# Altium PCB 磁悬浮打样.PcbDoc
Units mm, origin at the board's own origin, x right, y up, seen from the top; angles counter-clockwise.
Board outline 100.35 x 100.23 mm, 2 copper layers (Top Layer, Bottom Layer); 75 components, 80 nets, 271 pads, 79 vias.
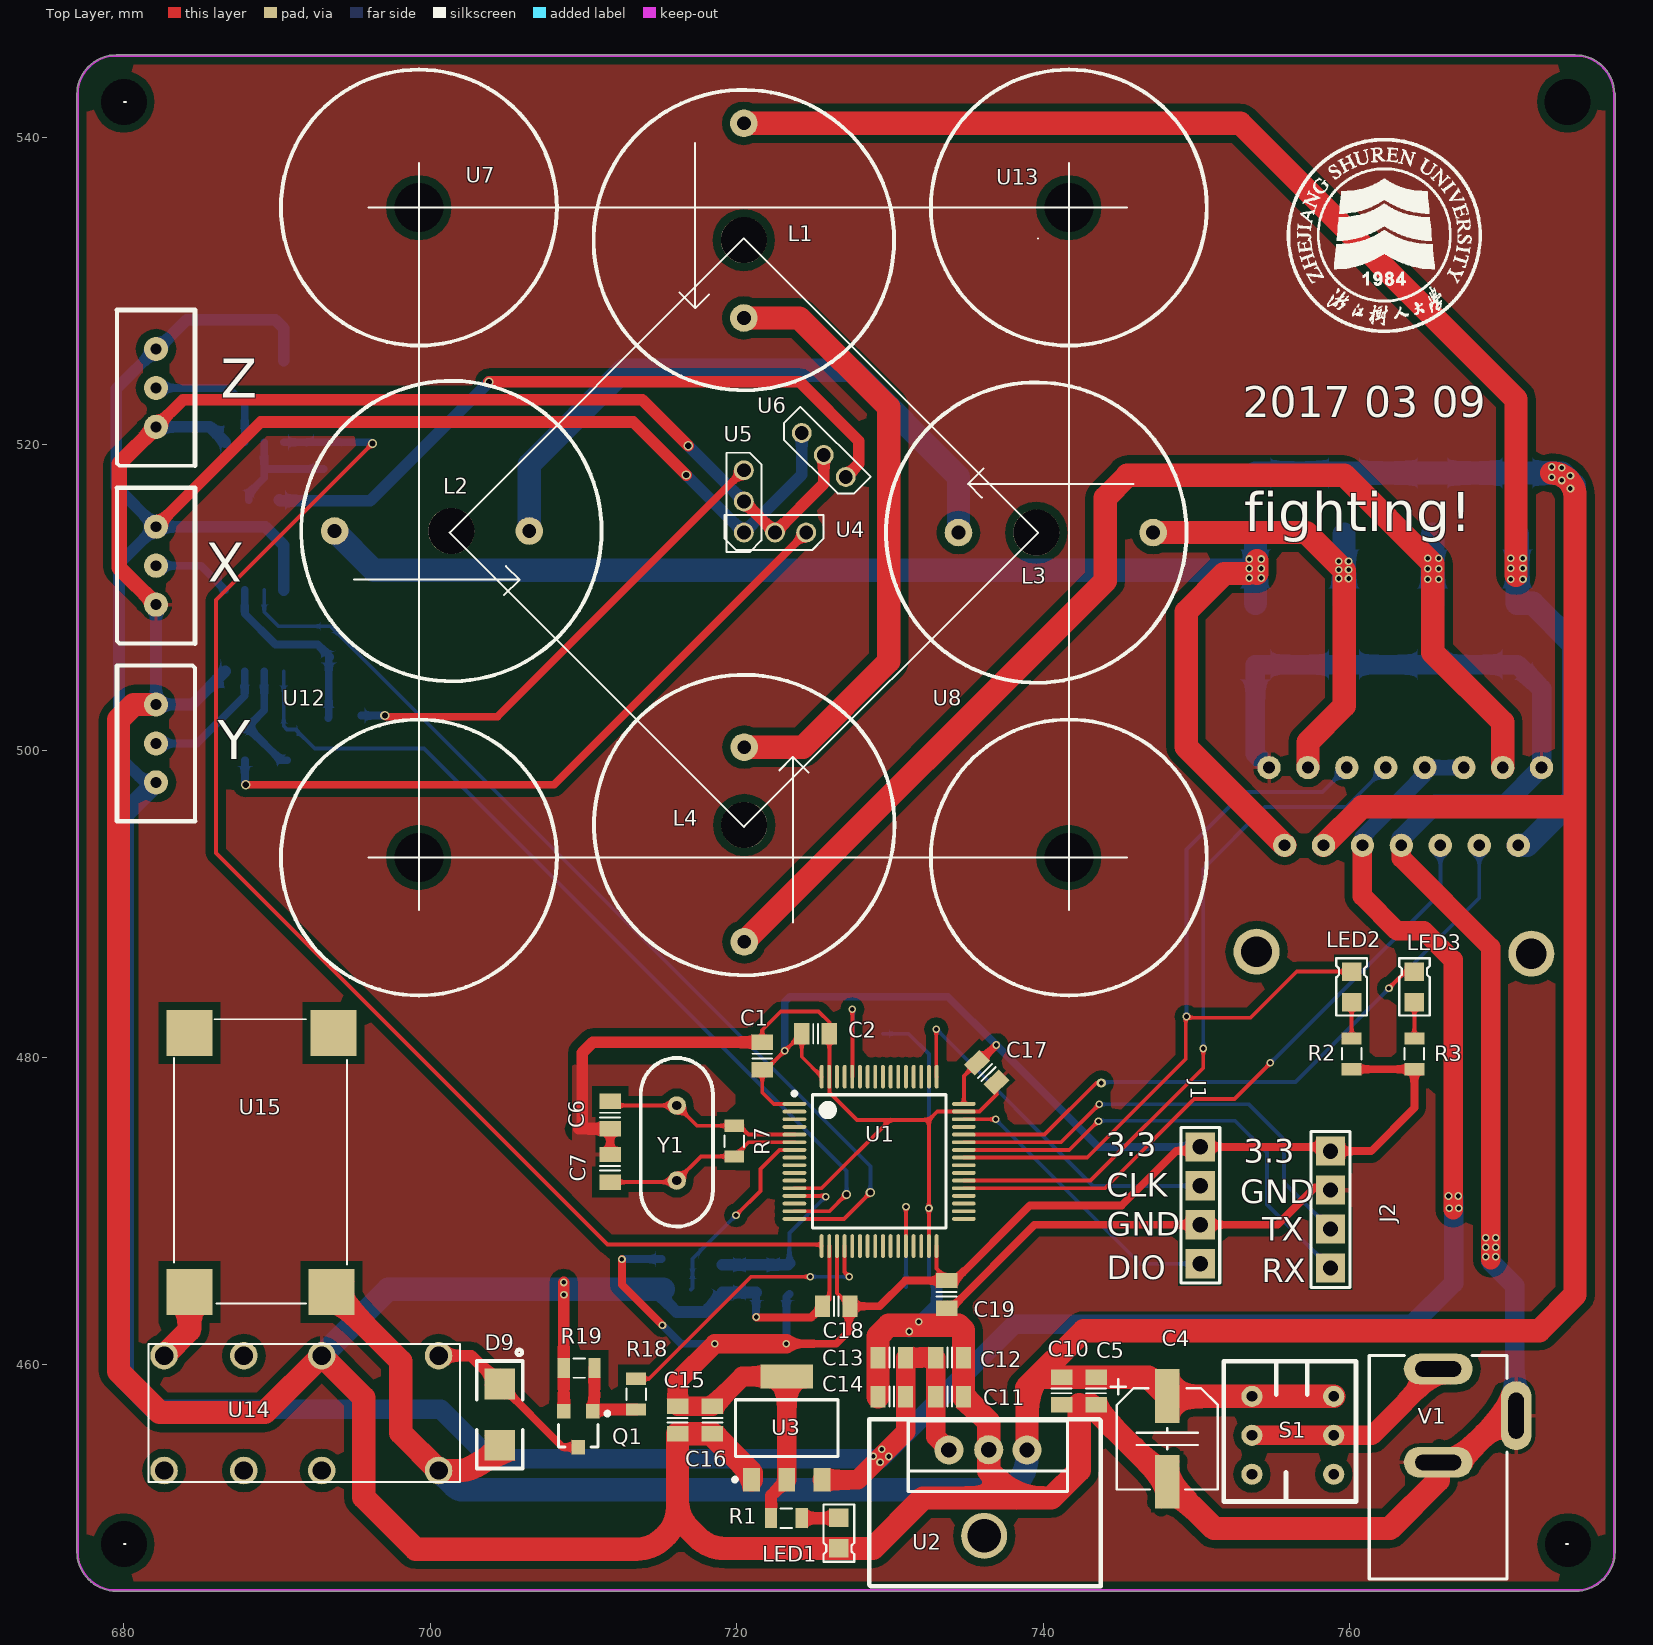
[diagram p0: Top Layer view]
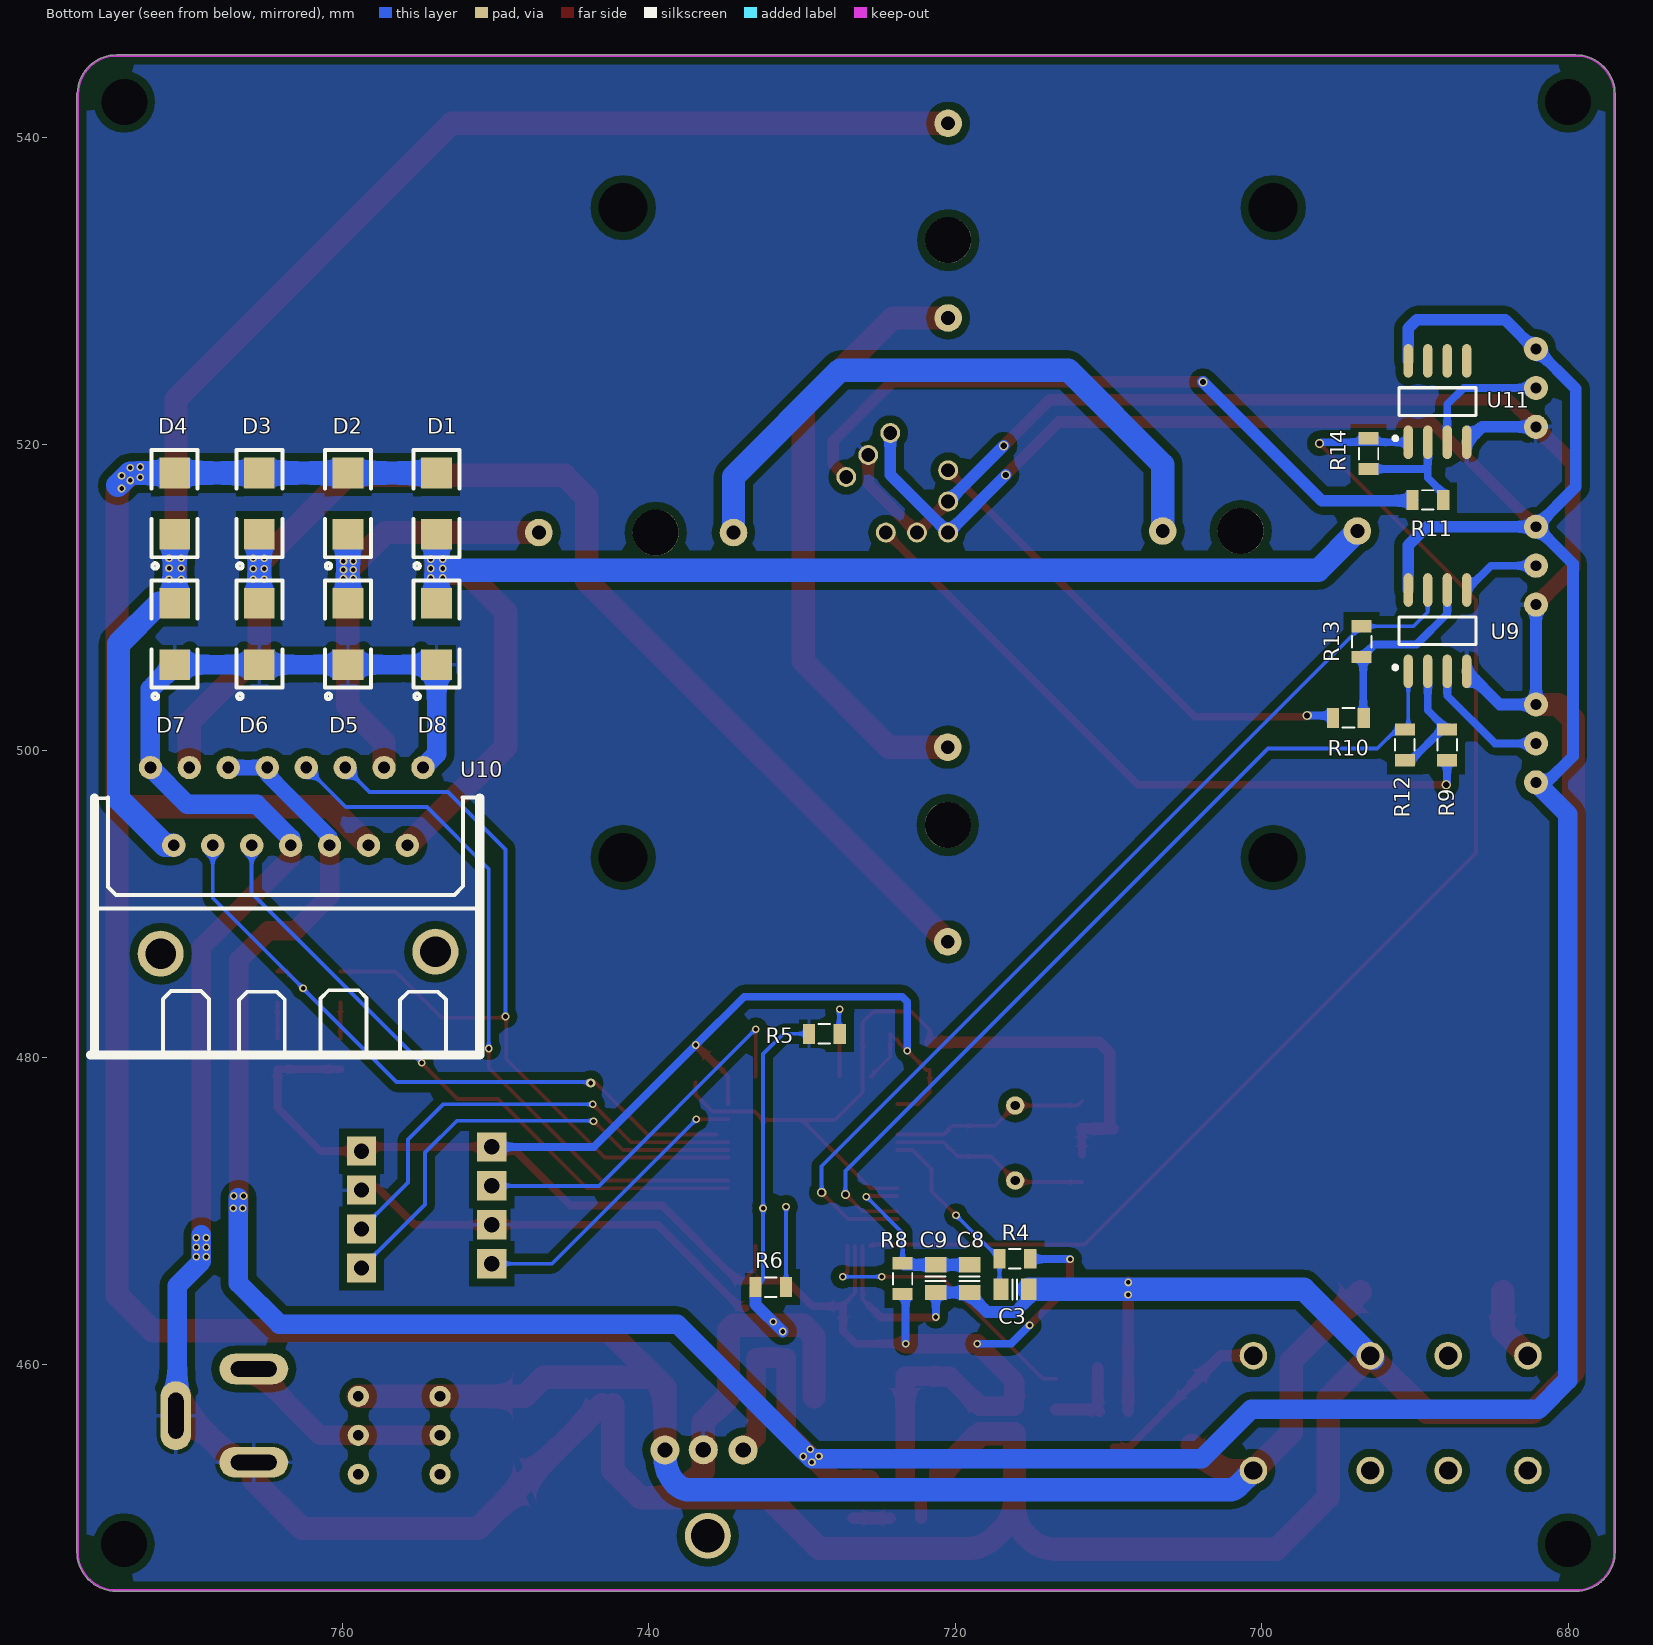
[diagram p1: Bottom Layer view, seen from below]

## Layer stack, top to bottom
Top Solder: solder mask 0.0102, Solder Resist, Dk 3.5
Top Layer: signal copper 0.0356
Dielectric 1: dielectric 0.32, FR-4, Dk 4.8
Bottom Layer: signal copper 0.0356
Bottom Solder: solder mask 0.0102, Solder Resist, Dk 3.5

## Board outline
676.961,447.749 cw(c677.025,447.75) 676.961,447.75 676.961,542.85 cw(c679.525,542.85) 679.524,545.414 cw(c679.525,545.35) 679.525,545.414 774.725,545.414 cw(c774.725,542.85) 777.288,542.93 cw(c777.252,542.877) 777.316,542.877 777.316,447.75 cw(c774.752,447.75) 774.753,445.186 cw(c774.752,445.25) 774.752,445.186 679.525,445.186 cw(c679.525,447.75)

## Design rules (kind name [scope] priority, off if disabled: settings)
Clearance Clearance_1 [InPolygon] p1: gap=0.508
Clearance [All] p2: gap=0.2
ComponentClearance [All] p1 off: gap=0.254 collisioncheckmode=3 verticalgap=0.254 showdistances=FALSE
HoleSize [All] p1: absolutevalues=TRUE maxlimit=3.5 minlimit=0.3 maxpercent=80.000 minpercent=20.000
MinimumSolderMaskSliver [All] p1: minsoldermaskwidth=0
PlaneClearance [All] p1: clearance=1.016
PolygonConnect [All] p1: connectstyle=Relief reliefconductorwidth=0.254 reliefentries=4 polygonreliefangle="90 Angle" airgapwidth=0.254
RoutingVias [All] p1: holewidth=0.3 width=0.5 viastyle="Through Hole" minholewidth=0.3 minwidth=0.3 maxholewidth=0.711 maxwidth=1.27
SilkToSilkClearance [All] p1: silktosilkclearance=0
SilkToSolderMaskClearance [IsPad] p1: minsilkscreentomaskgap=0 clearancetoexposedcopper=TRUE
SolderMaskExpansion [All] p1: expansion=0.102
Width [All] p1: maxlimit=2.54 minlimit=0.254 preferedwidth=0.254
24 further rules are at their usual default settings.

## Classes and differential pairs
component class 磁悬浮打样: C1 C2 C3 C4 C5 C6 C7 C8 C9 C13 C14 C15 C16 C17 C18 C19 D1 D2 D3 D4 D5 D6 D7 D8 D9 J1 J2 L1 L2 L3 L4 LED1 LED2 LED3 Q1 R1 R2 R3 R4 R5 R6 R7 R8 R9 R10 R11 R12 R13 R14 R18 R19 S1 U1 U3 U4 U5 U6 U7 U8 U9 U10 U11 U12 U13 U14 U15 V1 X Y Y1 Z

## Components (designator, comment, footprint, x,y, rotation, side; value= is the part's Value field where it differs from the comment)
C1 "Cap" CAP_0805 721.675,480.1 r270 top
C2 "Cap" CAP_0805 725.15,481.55 r0 top
C3 "104" CAP_0805 716.125,464.875 r0 bottom
C4 "Cap Pol1" CAP_ELEC_AL_6.3x4.2 748.1,455.125 r90 top
C5 "Cap" CAP_0805 743.45,458.25 r90 top
C6 "Cap" CAP_0805 711.75,476.25 r90 top
C7 "Cap" CAP_0805 711.75,472.775 r270 top
C8 "Cap" CAP_0805 719.075,465.575 r270 bottom
C9 "10uF" CAP_0805 721.288,465.575 r270 bottom
C10 "0.1uF" CAP_0805 741.2,458.25 r270 top
C11 "10uF" CAP_0805 733.9,457.875 r0 top
C12 "0.1uF" CAP_0805 733.9,460.425 r0 top
C13 "10uF" CAP_0805 730.125,460.425 r180 top
C14 "0.1uF" CAP_0805 730.125,457.875 r180 top
C15 "10uF" CAP_0805 716.149,456.35 r270 top
C16 "0.1uF" CAP_0805 718.424,456.35 r270 top
C17 "Cap" CAP_0805 736.325,479.025 r315 top
C18 "Cap" CAP_0805 726.5,463.775 r180 top
C19 "Cap" CAP_0805 733.7,464.55 r270 top
D1 "Diode" 1N5819 753.85,516.136 r90 bottom
D2 "Diode" 1N5819 759.63,516.136 r90 bottom
D3 "Diode" 1N5819 765.409,516.136 r90 bottom
D4 "Diode" 1N5819 770.939,516.136 r90 bottom
D5 "Diode" 1N5819 759.63,507.633 r90 bottom
D6 "Diode" 1N5819 765.409,507.633 r90 bottom
D7 "Diode" 1N5819 770.939,507.633 r90 bottom
D8 "Diode" 1N5819 753.85,507.633 r90 bottom
D9 "Diode" 1N5819 704.55,456.7 r270 top
J1 "SIP4" HDR1X4_180_2.54 750.25,466.551 r90 top
J2 "SIP4" "SIP4 H" 758.75,466.275 r90 top
L1 "线圈" 线圈 720.475,528.25 r90 top
L2 "线圈" 线圈 706.475,514.35 r180 top
L3 "线圈" 线圈 734.475,514.25 r0 top
L4 "线圈" 线圈 720.5,500.25 r270 top
LED1 "LED" LED0805蓝 726.675,448.975 r270 top
LED2 "LED" LED0805蓝 760.128,484.604 r90 top
LED3 "LED" LED0805蓝 764.222,484.604 r90 top
Q1 "NPN" SOT23-3 709.671,455.758 r180 top
R1 "170" RES_0805 723.25,449.95 r0 top
R2 "170" RES_0805 760.125,480.24 r90 top
R3 "170" RES_0805 764.222,480.24 r90 top
R4 "Res2" RES_0805 716.125,466.875 r180 bottom
R5 "Res2" RES_0805 728.55,481.55 r0 bottom
R6 "Res2" RES_0805 732.05,465.025 r180 bottom
R7 "Res2" RES_0805 719.85,474.55 r270 top
R8 "Res2" RES_0805 723.45,465.575 r90 bottom
R9 "3K" RES_0805 687.925,500.4 r270 bottom
R10 "3K" RES_0805 694.36,502.158 r0 bottom
R11 "3K" RES_0805 689.175,516.375 r0 bottom
R12 "10K" RES_0805 690.675,500.4 r270 bottom
R13 "10K" RES_0805 693.496,507.136 r270 bottom
R14 "10K" RES_0805 693.05,519.4 r270 bottom
R18 "2K" RES_0805 713.45,458.044 r90 top
R19 "5K" RES_0805 709.725,459.744 r180 top
S1 "SW DPDT" SW6 756.6,455.225 r90 top
U1 "STM32F103RCT6" LQFP64_L 729.3,473.225 r0 top
U2 "7805" TO-220 738.95,454.4 r180 top
U3 "1117-3.3" SOT223 723.275,455.825 r0 top
U4 "3503X" TO-92UA 720.475,514.25 r0 top
U5 "3503Y" TO-92UA 720.475,514.25 r90 top
U6 "3503Z" TO-92UA 724.25,520.75 r315 top
U7 "磁铁" 磁铁 699.275,535.45 r0 top
U8 "磁铁" 磁铁 741.675,493.05 r0 top
U9 "LM358" SOIC-8 688.55,507.85 r90 bottom
U10 "L298" L298N 755.75,493.84 r0 bottom
U11 "LM358" SOIC-8 688.55,522.795 r90 bottom
U12 "磁铁" 磁铁 699.275,493.05 r0 top
U13 "磁铁" 磁铁 741.675,535.45 r0 top
U14 "5v" relay-5v 700.557,453.06 r180 top
U15 "无线充电模块" 无线充电模块 684.301,464.718 r0 top
V1 "DC005" DC-005 765.775,460.7 r90 top
X "10K" VR 682.125,514.628 r270 top (schematic designator R16)
Y "10K" VR 682.125,497.95 r90 top (schematic designator R15)
Y1 "8Mhz" crystal 716.1,474.475 r270 top
Z "10K" VR 682.125,526.225 r270 top (schematic designator R17)

## Footprints (in the part's own frame and the unit in brackets; to place one, negate y for a bottom-side part, rotate by r counter-clockwise, add the part's x,y. Pads: shape width x height; smd on the part's side, far side on the other; paste and mask are expansions set on the pad)
1N5819 [mm]
  rect 2x2 smd: 1(-2,0) 2(2,0)
  silkscreen extent -4.24,-1.5 3.5,1.5, body extent -2.37,-1.35 2.63,1.35, height 2.28
CAP_0805 [mm]
  rect 1x1.4 smd: 1(-0.9,0) 2(0.9,0)
  Top Layer pour cut-out: -0.4,0.8 0.4,0.8 0.4,-0.8 -0.4,-0.8
  silkscreen extent -0.15,-0.65 0.15,0.65, body extent -1.1,-0.72 1.1,0.73, height 1.34
CAP_ELEC_AL_6.3x4.2 [mm]
  rect 3.5x1.6 smd: 1(2.8,0) 2(-2.8,0)
  silkscreen extent -3.3,-3.3 3.9,3.7, body extent -3.3,-3.3 3.3,3.3, height 4.23
crystal [mm]
  round 1.2 hole 0.6: 1(-2.4,0) 2(2.5,0)
  silkscreen extent -5.5,-2.35 5.5,2.35, body extent -5.45,-2.25 5.53,2.25, height 3.6
DC-005 [mm] "DC电源插座"
  oval 2x4.5 hole 1 slot 3 at 90 deg: 1(-1.016,0) 2(-7.112,0)
  oval 4.5x2 hole 1 slot 3 at 0 deg: 3(-4.064,-5.08)
  silkscreen extent -14.73,-4.5 -0.13,4.5, body extent -14.59,-5.01 -0.76,4.5, height 11.02
HDR1X4_180_2.54 [mm]
  rect 1.905x1.905 hole 1: 1(0,0) 2(2.54,0) 3(5.08,0) 4(7.62,0)
  silkscreen extent -1.27,-1.27 8.89,1.27, body extent -1.27,-1.27 8.89,1.27, height 7.58
L298N [mil]
  round 118.11 hole 78.74: 0(-72,273) 0(634,278)
  round 60 hole 30: 1(-40,-200) 2(0,0) 3(60,-200) 4(100,0) 5(160,-200) 6(200,0) 7(260,-200) 8(300,0) 9(360,-200) 10(400,0) 11(460,-200) 12(500,0) 13(560,-200) 14(600,0) 15(660,-200)
  silkscreen extent -188,-123 814,538, body extent -160,-194 785,535, height 984
LED0805蓝 [mm] "LED0805蓝"
  rect 1.2x1.27 smd: A(-1,0) K(1,0)
  silkscreen extent -1.87,-1 1.87,1, body extent -1.05,-0.67 1.05,0.68, height 0.8
LQFP64_L [mm] "Thin QFP, 64-Leads, Body 10x10mm, Pitch 0.5mm, IPC High Density"
  oval 1.55x0.25 smd: 1(-5.525,3.75) 2(-5.525,3.25) 3(-5.525,2.75) 4(-5.525,2.25) 5(-5.525,1.75) 6(-5.525,1.25) 7(-5.525,0.75) 8(-5.525,0.25) 9(-5.525,-0.25) 10(-5.525,-0.75) 11(-5.525,-1.25) 12(-5.525,-1.75) 13(-5.525,-2.25) 14(-5.525,-2.75) 15(-5.525,-3.25) 16(-5.525,-3.75) 33(5.525,-3.75) 34(5.525,-3.25) 35(5.525,-2.75) 36(5.525,-2.25) 37(5.525,-1.75) 38(5.525,-1.25) 39(5.525,-0.75) 40(5.525,-0.25) 41(5.525,0.25) 42(5.525,0.75) 43(5.525,1.25) 44(5.525,1.75) 45(5.525,2.25) 46(5.525,2.75) 47(5.525,3.25) 48(5.525,3.75)
  oval 0.25x1.55 smd: 17(-3.75,-5.525) 18(-3.25,-5.525) 19(-2.75,-5.525) 20(-2.25,-5.525) 21(-1.75,-5.525) 22(-1.25,-5.525) 23(-0.75,-5.525) 24(-0.25,-5.525) 25(0.25,-5.525) 26(0.75,-5.525) 27(1.25,-5.525) 28(1.75,-5.525) 29(2.25,-5.525) 30(2.75,-5.525) 31(3.25,-5.525) 32(3.75,-5.525) 49(3.75,5.525) 50(3.25,5.525) 51(2.75,5.525) 52(2.25,5.525) 53(1.75,5.525) 54(1.25,5.525) 55(0.75,5.525) 56(0.25,5.525) 57(-0.25,5.525) 58(-0.75,5.525) 59(-1.25,5.525) 60(-1.75,5.525) 61(-2.25,5.525) 62(-2.75,5.525) 63(-3.25,5.525) 64(-3.75,5.525)
  silkscreen extent -5.65,-4.35 4.35,4.55, body extent -5,-5 5,5, height 1.6
relay-5v [mm]
  round 1.8 hole 1.2: 1(0,0) 2(0,-7.493) 3(7.62,0) 4(12.7,0) 5(17.907,0) 6(7.62,-7.493) 7(12.7,-7.493) 8(17.907,-7.493)
  silkscreen extent -1.4,-8.26 18.92,0.76, body extent -1.38,-8.86 18.92,1.24, height 11.4
RES_0805 [mm] "Chip Resistor, Body 2.0x1.2mm, 0805, IPC Medium Density"
  rect 0.8x1.3 smd: 1(-1,0) 2(1,0)
  Top Layer pour cut-out: -0.6,0.75 0.6,0.75 0.6,-0.75 -0.6,-0.75
  silkscreen extent -0.38,-0.64 0.38,0.64, body extent -1.1,-0.67 1.1,0.68, height 0.69
"SIP4 H" [mm]
  rect 1.905x1.905 hole 1: 1(0,0) 2(2.54,0) 3(5.08,0) 4(7.62,0)
  silkscreen extent -1.27,-1.27 8.89,1.27, body extent -2.31,-7.24 10.19,0.36, height 5.9
SOIC-8 [mm]
  oval 2.2x0.6 smd: 1(-2.654,1.905) 2(-2.654,0.635) 3(-2.654,-0.635) 4(-2.654,-1.905) 5(2.654,-1.905) 6(2.654,-0.635) 7(2.654,0.635) 8(2.654,1.905)
  silkscreen extent -2.52,-2.5 0.9,2.88, body extent -3,-2.45 3,2.45, height 1.7
SOT23-3 [mm]
  rect 0.9x0.95 smd: 1(-0.95,-1.175) 2(0.95,-1.175) 3(0,1.175)
  silkscreen extent -2.03,-1.14 1.3,1.18, body extent -1.45,-1.4 1.45,1.4, height 1.2
SOT223 [mm]
  rect 1.1x1.55 smd: 1(-2.3,-3.375) 2(0,-3.375) 3(2.3,-3.375)
  rect 3.45x1.55 smd: 4(0,3.375)
  silkscreen extent -3.5,-3.48 3.35,1.85, body extent -3.25,-3.48 3.25,3.48, height 1.7
SW6 [mm]
  round 1.38 hole 0.7: 1(-2.409,-2.357) 2(0.131,-2.357) 3(2.671,-2.357) 4(2.671,2.977) 5(0.131,2.977) 6(-2.409,2.977)
  silkscreen extent -4.19,-3.81 4.95,4.83, body extent -4.52,-4.02 5.28,5.18, height 18
TO-92UA [mm]
  round 1.3 hole 0.9: 1(0,0) 2(2.032,0) 3(4.064,0)
  silkscreen extent -1.27,-1.14 5.21,1.14, body extent -0.57,-2.16 4.63,2.03, height 15
TO-220 [mm]
  round 3 hole 2.2: 0(2.8,5.6)
  round 1.9 hole 1: 1(0,0) 2(2.502,-0.013) 3(5.1,0.005)
  silkscreen extent -4.8,-2 10.3,8.9, body extent -4.59,-2.09 10.19,8.72, height 25
VR [mil]
  round 62 hole 28: 1(0,0) 2(200,0) 3(100,0)
  silkscreen extent -100,-100 300,100, body extent -91,-95 285,95, height 453
无线充电模块 [mm]
  rect 3x3 smd: 1(0,0) 2(9.271,0) ""(0,16.891) ""(9.398,16.891)
  silkscreen extent -1.02,-0.76 10.29,17.78, body extent -0.89,-0.64 10.16,17.65, height 1.9
磁铁 [mm]
  round 3 hole 3.2: 0(0,0)
  silkscreen extent -9,-9 9,9, body extent -8.93,-8.98 9,8.98, height 18
线圈 [mm]
  round 1.8 hole 0.9: 0(0,0) 1(12.7,0)
  round 3 hole 3: 2(5.08,0)
  silkscreen extent -4.72,-9.8 14.88,9.8, body extent -4.7,-9.91 14.86,9.62, height 12.2

## Part data
C1: "Capacitor"
C2 C17 C18 C19: library part Cap_1, "Capacitor"
C3 C9: library part C
C4: library part "Cap Pol1_1", "Polarized Capacitor (Radial)"
C5: library part Cap_2, "Capacitor"
C6 C7 C8: library part Cap_3, "Capacitor"
C10 C11 C12 C13 C14 C15 C16: library part CAP
D1 D2 D3 D4 D5 D6 D7 D8 D9: "Default Diode"
J1 J2: "jointbar"
Q1: library part NPN1, "贴片三极管"
R1 R2 R3 R9 R10 R11 R12 R13 R14 R18 R19: library part RESistor
R4 R8: library part Res2_1, "Resistor"
R5 R6 R7: "Resistor"
S1: "Switch"
U1: library part STM32F103RDT6
U2: library part 7812
U3: library part 1117
U4 U5 U6: library part 3503
U9 U11: "双运放"
U14: library part relay-5V
U15: library part 无线充电
X Y Z: library part RESVR, "Potentiometer"
Y1: library part XTAL, "Crystal Oscillator"

## Free pads (board coordinates)
  round 1.8 hole 3: 0(680.033,448.258) 0(680.033,542.342) 0(774.217,542.342) 0(774.242,448.258)

## Via types
v1: diameter 0.5, hole 0.3, Top Layer to Bottom Layer, 70 vias
v2: diameter 0.6, hole 0.4, Top Layer to Bottom Layer, 8 vias
v3: diameter 0.6, hole 0.3, Top Layer to Bottom Layer, 1 vias

## Nets (pads, with @x,y where several pads share a name; then routed paths per layer and width w, separated by ;. In a path a pad name is that pad's centre, name@x,y a point inside that pad or via, vN(x,y) a via of type N, cw(c..) or ccw(c..) an arc to the next point about the centre after c; other vN are vias at no path point)
+3V3: C1.2 C2.1 C15.1 C16.1 C17.1 C18.1 C19.1 J1.4 J2.4 R1.1 R2.1 R3.1 R4.2 R8.1 U1.1 U1.19 U1.32 U1.48 U1.64 U3.2 U3.4 | length 155.2
  Top Layer w0.254: v1@723.116,480.416 721.9,479.2 C1.2 721.675,477.725 722.425,476.975 U1.1 ; v1@723.14,480.439 C2.1 724.25,480.05 U1.64 ; U1.19 726.55,464.625 C18.1 ; U1.32 733.05,466.25 C19.1@733.7,465.6 ; U1.48 734.825,478.798 C17.1@735.559,479.531 ; J2.4@758.474,474.171 J2.4
  Top Layer w0.508: v1(712.521,466.852) 712.521,465.176 v1(715.162,462.534) ; v1@723.114,480.417 v1(723.138,480.441) ; v1(723.25,461.325) 726.5,461.325 727.325,462.15 C18.1@727.325,463.85 ; C18.1 729.325,463.775 731,465.45 C19.1 734.233,465.45 739.14,470.357 745.134,470.357 748.703,473.926 750.005,473.926 J1.4 J2.4@758.474,474.171 ; C17.1@735.559,479.531 735.64,479.531 v1(736.93,480.822) ; J2.4 761.395,473.895 764.222,476.722 R3.1 ; R2.1 R3.1 ; 764.222,478.525 R3.1
  Top Layer w0.762: R1.1 722.25,451.425 U3.2
  Top Layer w1.27: v1(723.25,461.325) v1(718.576,461.325) 716.149,458.898 C15.1 C16.1 720.374,459.2 U3.4 U3.2
  Bottom Layer w0.508: v1(712.521,466.852) 715.102,466.852 R4.2 ; v1(715.162,462.534) 716.371,461.325 v1(718.576,461.325) ; v1(723.138,480.441) 723.138,483.641 723.468,483.972 733.781,483.972 v1(736.93,480.822) 743.581,474.171 J1.4 ; v1(723.25,461.325) 723.25,464.375 R8.1
+5V: C11.1 C12.1 C13.1 C14.1 U2.3 U3.3 U4.1 U5.1 U6.1 U9.8 U10.6 U10.9 U10.11 U11.8 X.1 Y.1 Z.1 | length 303.8
  Top Layer w0.762: X.1 688.96,521.462 713.263,521.462 v2(716.717,518.008)
  Top Layer w1.27: U3.3 727.9,452.45 731.025,455.575 C14.1 C13.1 C12.1 C11.1 733,455.245 U2.3 ; U10.6 760.83,490.526 763.088,488.268 764.841,488.268 766.743,486.366 766.743,470.06
  Bottom Layer w0.762: Y.1 681.423,497.95 679.712,499.661 679.712,512.215 X.1 ; U9.8 690.455,513.42 689.248,514.628 X.1 ; U11.8 690.455,527.57 689.9,528.125 684.125,528.125 682.225,526.225 Z.1 679.525,523.625 679.525,517.228 X.1 ; v2(716.717,518.008) U4.1 724.25,518.025 U6.1
  Bottom Layer w1.016: U10.6 760.83,494.405 764.894,498.469 U10.9 U10.11
  Bottom Layer w1.27: Y.1 680.058,495.883 680.058,458.954 681.965,457.048 700.71,457.048 703.936,453.822 729.361,453.822 738.149,462.61 764.108,462.61 766.775,465.277 766.775,470.865
  other v1: 729.361,453.593 729.92,453.974 728.904,454 729.463,454.457 766.496,470.179 767.105,470.179 766.445,470.967 767.08,470.967
+12V: C4.1 C5.2 C10.1 D1.2 D2.2 D3.2 D4.2 D9.2 S1.3 S1.4 U2.1 U10.4 U14.1 U15.2 | length 216
  Top Layer w1.524: U15.2 698.094,460.197 698.094,455.524 U14.1 701.858,453.06 ccw(c701.858,455.6) 703.654,453.804 D9.2 ; U2.1 738.95,458.4 ; U10.4 760.817,496.367 774.649,496.367 ; S1.3 S1.4 748.129,457.896 C4.1 746.875,459.15 C5.2 C10.1 739.7,459.15 738.95,458.4 ; 773.175,518.136 cw(c773.175,516.611) 774.7,516.611 774.7,464.515 772.363,462.178 742.651,462.178 738.911,458.439 738.95,458.4
  Bottom Layer w1.524: U14.1 701.58,452.037 ccw(c702.152,452.609) 702.152,451.8 737.346,451.8 ccw(c737.346,453.016) 738.206,452.156 ccw(c736.41,453.952) 738.95,453.952 U2.1 ; D1.2 D2.2 D3.2 D4.2 773.839,518.136 774.65,517.325
  other v1: 774.4,517.125 773.825,517.65 773.175,517.85 774.4,517.95 773.825,518.475 773.175,518.525
BOOT0: R5.1 U1.60 | length 6
  Top Layer w0.254: U1.60 v1(727.55,483.15)
  Bottom Layer w0.254: R5.1@727.6,481.6 v1@727.6,483.15
BOOT1: R6.2 U1.28 | length 7.8
  Top Layer w0.254: U1.28 v1(731.05,470.275)
  Bottom Layer w0.254: R6.2 v1(731.05,470.275)
GND: C1.1 C2.2 C3.1 C4.2 C5.1 C6.1 C7.1 C8.2 C9.2 C10.2 C11.2 C12.2 C13.2 C14.2 C15.2 C16.2 C17.2 C18.2 C19.2 D5.1 D6.1 D7.1 D8.1 J1.2 J2.3 LED1.K Q1.2 R5.2 R6.1 R19.2 U1.12 U1.18 U1.31 U1.47 U1.63 U2.2 U3.1 U4.2 U5.2 U6.2 U9.4 U10.1 U10.8 U10.15 U11.4 U14.6 V1.2 V1.3 X.2 Y.2 Z.2 | length 527.2
  Top Layer w0.254: C1.1 721.675,481.797 722.884,483.006 725.348,483.006 726.05,482.304 C2.2 U1.63 726.05,477.732 727.848,475.934 730.01,475.934 ; U1.12 725.551,471.475 730.01,475.934 ; C18.2 726.05,464.225 U1.18 ; U1.31 v1(732.55,470.175) 732.55,475.934 ; C17.2 736.961,477.586 735.85,476.475 U1.47 733.091,476.475 732.55,475.934 ; 730.01,475.934 732.55,475.934
  Top Layer w0.507: v1(721.275,463.075) 721.3,463.05 724.875,463.05 C18.2
  Top Layer w0.508: C7.1 C6.1 ; C19.2 733.998,463.65 739.439,469.091 J1.2 755.291,469.091 757.725,471.525 758.58,471.525 J2.3
  Top Layer w0.762: Z.2 683.89,522.91 713.847,522.91 v2(716.844,519.913) ; Q1.2@708.725,456.938 R19.2 v1(708.725,465.328) ; C6.1 709.712,475.35 709.93,475.568 709.93,480.314 710.616,481 C1.1 ; U5.2 U4.2 725.687,517.43 U6.2
  Top Layer w1.016: X.2 679.729,511.943 679.729,518.749 Z.2
  Top Layer w1.27: 742.35,457.35 C5.1@743.075,457.35 ; U10.8 763.37,493.015 769.188,487.197 769.188,466.801
  Top Layer w1.524: Y.2 680.678,503.03 679.679,502.031 679.679,459.537 682.371,456.844 689.229,456.844 U14.6 695.681,457.81 695.681,451.318 699.074,447.925 713.448,447.925 ccw(c713.448,450.465) 715.244,448.669 715.405,448.83 ccw(c713.609,450.626) 716.149,450.626 716.149,451.053 ; U3.1 720.975,452.898 C16.2 C15.2 716.149,451.053 ; C14.2 C13.2 729.225,461.825 729.925,462.525 734.475,462.525 734.8,462.2 C12.2 C11.2 736.448,456.227 U2.2 736.448,453.052 738.238,451.262 ; 742.35,457.35 742.35,453.075 740.537,451.262 738.238,451.262 ; C5.1@743.075,457.35 C4.2 751.15,449.275 762.625,449.275 765.775,452.425 V1.2 766.988,453.588 770.036,456.636 V1.3 ; 716.149,451.053 ccw(c718.689,451.053) 716.893,449.257 717.431,448.719 ccw(c719.227,450.515) 719.227,447.975 LED1.K 728.875,447.975 732.162,451.262 738.238,451.262
  Bottom Layer w0.254: R5.2 731.224,481.55 732.55,480.224 v1(732.55,470.175) 732.55,465.525 R6.1
  Bottom Layer w0.507: v1(721.275,463.075) 721.275,464.662 C9.2
  Bottom Layer w0.762: X.2 Y.2 684.479,503.03 U9.4 ; Z.2 685.641,521.145 U11.4 ; C3.1 715.225,464.25 716.075,463.4 717.95,463.4 719.075,464.525 C8.2 C9.2 ; v2(716.844,519.913) U5.2 ; v1(731.266,462.128) 733.05,463.912 R6.1
  Bottom Layer w1.27: U10.1 753.85,499.804 D8.1 D5.1 D6.1 D7.1 772.514,504.058 U10.15 770.119,496.525 765.587,496.525 763.37,494.308 U10.8 ; 769.188,468.427 769.188,466.7 770.763,465.125 V1.3@770.763,456.728
  Bottom Layer w1.524: U14.6@692.785,460.375 697.285,464.875 C3.1
  other v1: 731.876,462.763 708.736,464.515 768.883,467.004 769.518,467.004 768.883,467.614 769.518,467.614 768.883,468.249 769.518,468.249
IN1: LED2.K U1.41 U10.5 | length 55.5
  Top Layer w0.254: U1.41 742.875,473.475 749.3,479.9 749.3,482.6 753.542,482.6 756.545,485.604 LED2.K
  Bottom Layer w0.254: v1(749.351,482.676) 749.351,493.573 753.11,497.332 758.226,497.332 U10.5
IN2: U1.38 U10.7 | length 47
  Top Layer w0.254: U1.38 743.095,471.975 750.443,479.323 v1(750.443,480.593) ; U10.7@762.281,498.847 U10.7 U10.7@762.354,498.604
  Bottom Layer w0.254: v1(750.443,480.593) 750.443,492.303 754.482,496.341 759.776,496.341 U10.7 U10.7@762.354,498.626
IN3: U1.37 U10.10 | length 42.2
  Top Layer w0.254: U1.37 744.024,471.475 749.849,477.3 752.475,477.3 v1(754.825,479.65)
  Bottom Layer w0.254: v1(754.825,479.65) 765.91,490.735 U10.10
IN4: LED3.K U1.44 U10.12 | length 45.2
  Top Layer w0.254: U1.44@735.584,474.975 740.1,474.975 743.462,478.337 v3(743.788,478.337) ; v1(762.559,484.53) 763.632,485.604 LED3.K LED3.K@764.041,485.784
  Bottom Layer w0.254: v3(743.788,478.337) 743.725,478.4 756.454,478.4 768.45,490.396 U10.12
KEY0: U1.59
KEY1: U1.58
LED: R18.2 U1.20 | length 18.8
  Top Layer w0.254: R18.2 714.294,459.044 720.95,465.7 v1(724.8,465.7) ; U1.20 727.05,466 v1(727.35,465.7)
  Bottom Layer w0.254: v1(724.8,465.7) v1(727.35,465.7)
NetC6_2: C6.2 R7.1 U1.5 Y1.1 | length 12.9
  Top Layer w0.254: C6.2 712.025,476.875 Y1.1 717.425,475.55 R7.1 720.2,475.55 720.775,474.975 U1.5
NetC7_2: C7.2 R7.2 U1.6 Y1.2 | length 13.1
  Top Layer w0.254: C7.2 716,471.875 Y1.2 717.675,473.55 R7.2 720.775,474.475 U1.6
NetC8_1: C8.1 C9.1 R8.2 U1.13 | length 11.7
  Top Layer w0.254: U1.13@723.823,470.978 v1@725.819,470.978
  Bottom Layer w0.254: R8.2 723.45,468.558 v1(725.819,470.927)
  Bottom Layer w0.762: C8.1 C9.1 723.35,466.475 R8.2
NetD9_1: D9.1 Q1.3 U14.2 | length 11.6
  Top Layer w0.508: D9.1 708.667,454.583 Q1.3
  Top Layer w0.762: U14.2 702.697,460.553 D9.1
NetL1_0: L1.0 L4.0 | length 40.2
  Top Layer w1.524: L1.0 724.097,528.25 729.925,522.422 729.925,505.846 724.329,500.25 L4.0
NetL2_0: L2.0 L3.0 | length 41.4
  Bottom Layer w1.524: L2.0 706.475,518.675 712.65,524.85 727.525,524.85 734.475,517.9 L3.0
NetLED1_A: LED1.A R1.2 | length 2.4
  Top Layer w0.762: R1.2 LED1.A@726.65,449.95
NetLED2_A: LED2.A R2.2 | length 2.4
  Top Layer w0.254: R2.2@760.128,481.243 LED2.A
NetLED3_A: LED3.A R3.2 | length 2.4
  Top Layer w0.254: R3.2 LED3.A
NetQ1_1: Q1.1 R18.1 R19.1 | length 5.6
  Top Layer w0.762: Q1.1 710.725,457.038 R19.1 ; Q1.1@710.732,457.044 R18.1
NetR9_1: R9.1 R12.2 U9.2 | length 7.9
  Bottom Layer w0.508: U9.2 689.185,502.66 R9.1 688.26,501.4 690.26,499.4 R12.2
NetR9_2: R9.2 U4.3 | length 45
  Top Layer w0.508: v2(687.975,497.8) 708.089,497.8 U4.3
  Bottom Layer w0.508: R9.2 687.925,497.85 v2(687.975,497.8)
NetR10_1: R10.1 R13.2 U9.6 | length 12.3
  Bottom Layer w0.508: U9.6 687.915,508.958 689.923,506.95 692.683,506.95 R13.2 ; R10.1 693.4,502.198 R13.2@693.4,506.136
NetR10_2: R10.2 U5.3 | length 31.7
  Top Layer w0.508: v2(697.052,502.31) 697.128,502.234 704.395,502.234 U5.3
  Bottom Layer w0.508: R10.2@695.512,502.31 v2(697.052,502.31)
NetR11_1: R11.1 R14.2 U11.2 | length 8.1
  Bottom Layer w0.508: R11.1 688.175,516.825 689.185,517.835 689.185,518.45 ; U11.2 689.185,518.45 ; R14.2 689.235,518.4 689.185,518.45
NetR11_2: R11.2 U6.3 | length 45.3
  Top Layer w0.762: v2(703.853,524.078) 724.122,524.078 727.975,520.225 727.975,518.728 U6.3
  Bottom Layer w0.762: R11.2 690.219,516.331 696.106,516.331 v2(703.853,524.078)
NetR15_3: U9.3 Y.3 | length 8.7
  Bottom Layer w0.508: Y.3 684.792,500.49 687.915,503.613 U9.3
NetR16_3: U9.5 X.3 | length 5.2
  Bottom Layer w0.508: X.3 685.061,512.088 U9.5
NetR17_3: U11.3 Z.3 | length 8.7
  Bottom Layer w0.508: Z.3 686.84,523.685 687.915,522.61 U11.3
NetU14_8: U14.8 U15.1 | length 4.8
  Top Layer w1.524: U14.8 684.301,462.204 U15.1
OUT1: D1.1 D8.2 L2.1 U10.2 | length 89.1
  Top Layer w1.524: 753.415,511.581 751.815,511.581 749.325,509.092 749.325,500.265 U10.2 ; 753.948,511.581 753.948,512.424
  Bottom Layer w1.524: L2.1 696.337,511.788 v1@753.415,511.788 ; D8.2 D1.1
  other v1: 753.44,511.285 754.228,511.285 753.44,511.903 754.228,511.903 753.44,512.521 754.228,512.521
OUT2: D2.1 D5.2 L3.1 U10.3 | length 31.8
  Top Layer w1.524: L3.1 757.175,514.25 759.65,511.775 759.65,502.95 757.274,500.574 U10.3
  Bottom Layer w1.524: D5.2 D2.1
  other v1: 759.275,511.25 759.925,511.25 759.275,511.817 759.925,511.817 759.275,512.375 759.925,512.375
OUT3: D3.1 D6.2 L4.1 U10.13 | length 82.8
  Top Layer w1.524: L4.1 744.042,511.092 744.042,516.509 745.49,517.957 ; 745.49,518 759.65,518 765.425,512.225 765.425,506.425 769.974,501.876 U10.13
  Bottom Layer w1.524: D6.2 D3.1
  other v1: 765.1,511.2 765.8,511.2 765.1,511.887 765.8,511.887 765.1,512.575 765.8,512.575
OUT4: D4.1 D7.2 L1.1 U10.14 | length 93.5
  Top Layer w1.524: L1.1 752.85,540.95 770.85,522.95 770.85,511.475
  Bottom Layer w1.524: D4.1 D7.2 771.942,509.633 774.6,506.975 774.6,496.875 771.565,493.84 U10.14
  other v1: 770.5,511.199 771.3,511.199 770.5,511.914 771.3,511.914 770.5,512.579 771.3,512.579
PA0: U1.14
PA1: R12.1 U1.15 U9.1 | length 57.7
  Top Layer w0.254: U1.15 726.058,469.975 727.151,471.068 v2(727.177,471.068)
  Bottom Layer w0.254: U9.1 690.455,501.62 R12.1 691.232,501.4 692.48,500.151 699.618,500.151 727.177,472.592 v2(727.177,471.068)
PA2: R13.1 U1.16 U9.7 | length 63.3
  Top Layer w0.254: U1.16 727.006,469.475 v2(728.726,471.195)
  Bottom Layer w0.254: U9.7 689.185,509.06 690.109,508.136 R13.1 728.726,472.907 v2(728.726,471.195)
PA3: R14.1 U1.17 U11.1 | length 86.9
  Top Layer w0.254: v2(696.239,520.065) 686.029,509.854 686.029,493.344 711.581,467.792 721.665,467.792 725.458,467.792 U1.17
  Bottom Layer w0.508: U11.1 696.163,520.141 v2(696.239,520.065)
PA5: U1.21
PA6: U1.22
PA7: U1.23
PA9: J2.1 U1.42 | length 31.4
  Top Layer w0.254: U1.42 741.7,473.975 743.564,475.839 v1(743.61,475.839)
  Bottom Layer w0.254: v1(743.61,475.839) 743.61,475.865 743.6,475.875 752.525,475.875 ; 752.375,475.875 752.525,475.875 ; J2.1@758.25,466.275 J2.1 754.6,470.425 754.6,473.8 752.525,475.875
PA10: J2.2 U1.43 | length 30
  Top Layer w0.254: U1.43 741.175,474.475 v1(743.65,476.95)
  Bottom Layer w0.254: v1(743.65,476.95) 753.425,476.95 755.725,474.65 755.725,471.84 J2.2
PA12: U1.45
PA15: U1.50
PB0: U1.26
PB1: U1.27
PB3: U1.55
PB4: U1.56
PB5: U1.57
PB8: U1.61
PB9: U1.62
PB10: U1.29
PB11: U1.30
PB12: U1.33
PB13: U1.34
PB14: U1.35
PB15: U1.36
PC0: U1.8
PC1: U1.9
PC2: U1.10
PC3: U1.11
PC4: U1.24
PC5: U1.25
PC8: U1.39
PC9: U1.40
PC10: U1.51
PC11: U1.52
PC12: U1.53
PC13: U1.2
PC14: U1.3
PC15: U1.4
PD2: U1.54
RESET: C3.2 R4.1 U1.7 | length 12.5
  Top Layer w0.254: v1(719.963,469.713) 721.55,471.3 721.55,472.725 722.8,473.975 U1.7
  Bottom Layer w0.254: C3.2 717.125,464.975 R4.1 v1(719.963,469.713)
SWD_CLK: J1.3 U1.49 | length 24.6
  Top Layer w0.254: v1(733.025,481.85) 733.025,478.775 U1.49
  Bottom Layer w0.254: v1(733.025,481.85) 743.244,471.631 J1.3
SWD_DIO: J1.1 U1.46 | length 19.3
  Top Layer w0.254: U1.46 v1(736.9,475.975)
  Bottom Layer w0.254: v1(736.9,475.975) 746.324,466.551 J1.1
VCC: S1.2 S1.5 V1.1 | length 13.9
  Top Layer w1.27: S1.5 S1.2 761.447,455.356 V1.1
pads on no net: L1.2 L2.2 L3.2 L4.2 S1.1 S1.6 U2.0 U7.0 U8.0 U10.0 U11.5 U11.6 U11.7 U12.0 U13.0 U14.3 U14.4 U14.5 U14.7 U15.

## Polygon pours and split planes (outlines as drawn)
GND on Top Layer "Top Layer-No Net" (solid, remove dead copper, pour order 9): 780.263,547.726 671.551,547.726 667.715,543.89 673.075,538.531 673.075,440.182 783.717,440.182 785.038,441.503
GND on Top Layer "Top Layer-No Net" (solid, remove dead copper, pour order 6): 709.27,479.654 709.397,479.527 717.956,479.527 719.912,477.571 719.912,471.145 717.55,468.782 711.378,468.782 711.302,468.782 709.27,470.814
GND on Bottom Layer "Top Layer-No Net" (solid, remove dead copper, pour order 7): 785.114,437.947 783.717,436.55 668.553,436.55 668.553,553.415 665.201,556.768 679.196,570.763 799.135,570.763

## Keep-outs
Keep-Out Layer:
  lines w0.127: 777.225,542.85 ccw(c774.725,542.85) 774.725,545.35 679.525,545.35 ccw(c679.525,542.85) 677.025,542.85 677.025,447.75 ccw(c679.525,447.75) 679.525,445.25 774.752,445.25 ccw(c774.752,447.75) 777.252,447.75 777.252,542.877

## Other copper
Top Layer:
  pour cut-out: 711.75,471.875 711.75,477.15 715.825,477.15 717.425,475.55 719.85,475.55 719.85,473.55 717.675,473.55 716,471.875

## Silkscreen, mask and mechanical layers (free items; w line width, h text height)
Top Overlay:
  drawing of 4305 lines, arcs and shapes, not listed
  text "2017 03 09" at 753.008,521.767 h2.03
  text "fighting!" at 753.11,514.325 h2.54
  text "3.3" at 744.075,473.575 h1.52
  text "3.3" at 753.075,473.15 h1.52
  text "CLK" at 744.125,470.925 h1.52
  text "GND" at 752.875,470.5 h1.52
  text "GND" at 744.15,468.375 h1.52
  text "TX" at 754.3,468.05 h1.52
  text "DIO" at 744.15,467.075 h1.52 r180
  text "RX" at 754.25,465.325 h1.52